# EAGLE board CT_schematic (EAGLE 7.6.0)

Size 100 x 80 mm. Coordinates in mm from the lower left corner, seen from the top.
Outline: 0,0 100,0 100,80 0,80 0,0
Copper layers (1*16): Top 0.035mm / dielectric 1.5mm / Bottom 0.035mm
Design rules "default": minimum track width 10mil, minimum drill 24mil, track to track 8mil, track to pad 8mil, pad to pad 8mil, via to via 8mil, smd to smd 8mil, copper to edge 40mil, drill to drill 8mil, minimum pad ring 10mil, minimum via ring 8mil, stop-mask expansion 4mil, vias tented up to drill 0mil, thermal gap 10mil

## Footprints (pad centres in the part's own frame; a part is rotated, then mirrored left to right if it is on the bottom)
C0603 = smd 0.8 x 0.8: 1 -0.762,0; 2 0.762,0
C0402 = smd 0.5 x 0.5: 1 -0.508,0; 2 0.508,0
R0603 = smd 0.8 x 0.8: 1 -0.762,0; 2 0.762,0
C0805 = smd 1.2 x 1.3: 1 -1.016,0; 2 1.016,0
EXV-9H = smd 3.505 x 1.676: 1 -2.857,0; 2 2.857,0
L0603 = smd 0.8 x 0.8: 1 -0.762,0; 2 0.762,0
L1210 = smd 1.2 x 2.5: 1 -1.524,0; 2 1.524,0
PJ-037B_PACKAGE = drill 3.7 square: 1 12,0 | drill 3.2 square: 2 6,0
WLCSP36 = smd 0.229 x 0.229: A1 -1,1; A2 -0.6,1; A3 -0.2,1; A4 0.2,1; A5 0.6,1; A6 1,1; B1 -1,0.6; B2 -0.6,0.6; B3 -0.2,0.6; B4 0.2,0.6; B5 0.6,0.6; B6 1,0.6; C1 -1,0.2; C2 -0.6,0.2; C3 -0.2,0.2; C4 0.2,0.2; C5 0.6,0.2; C6 1,0.2; D1 -1,-0.2; D2 -0.6,-0.2; D3 -0.2,-0.2; D4 0.2,-0.2; D5 0.6,-0.2; D6 1,-0.2; E1 -1,-0.6; E2 -0.6,-0.6; E3 -0.2,-0.6; E4 0.2,-0.6; E5 0.6,-0.6; E6 1,-0.6; F1 -1,-1; F2 -0.6,-1; F3 -0.2,-1; F4 0.2,-1; F5 0.6,-1; F6 1,-1
SSOP-16 = smd 1.981 x 0.356: 1 -2.464,2.223; 2 -2.464,1.587; 3 -2.464,0.953; 4 -2.464,0.318; 5 -2.464,-0.318; 6 -2.464,-0.953; 7 -2.464,-1.587; 8 -2.464,-2.223; 9 2.464,-2.223; 10 2.464,-1.587; 11 2.464,-0.953; 12 2.464,-0.318; 13 2.464,0.318; 14 2.464,0.953; 15 2.464,1.587; 16 2.464,2.223
HTSS-105-01-G-D = drill 1 pad 1.8 square: 1 0,0 | drill 1 pad 1.8: 2 0,2.54; 3 2.54,0; 4 2.54,2.54; 5 5.08,0; 6 5.08,2.54; 7 7.62,0; 8 7.62,2.54; 9 10.16,0; 10 10.16,2.54
USB-A-H = drill 0.914: 1 2.718,3.493; 2 2.718,1.003; 3 2.718,-1.003; 4 2.718,-3.493 | drill 2.311: 5 0,-6.566; 6 0,6.566
SOT143B = smd 1 x 0.7: 1 -0.75,-1 | smd 0.6 x 0.7: 2 0.95,-1; 3 0.95,1; 4 -0.95,1
ABS07-32.768KHZ-7-T = smd 1.1 x 2.4: 1 -2.5,0; 2 0,0
WSON-8 = smd 0.3 x 0.6: 1 -0.75,0; 2 0.05,0; 3 0.85,0; 4 1.65,0; 5 1.65,3.8; 6 0.85,3.8; 7 0.05,3.8; 8 -0.75,3.8 | smd 3 x 2.6: PAD 0.45,1.9
SON-6 = smd 0.55 x 0.3: 1 -0.355,0.5 | smd 0.52 x 0.3: 2 -0.37,0; 3 -0.37,-0.5; 4 0.37,-0.5; 5 0.37,0; 6 0.37,0.5
SW_4-1437565-2 = smd 1.4 x 2.1: 1 -2.23,4.55; 2 -2.23,-4.55; 3 2.23,4.55; 4 2.23,-4.55
LGM67K-G1J2-24-Z = smd 0.8 x 1.4: A -2,0; C 0,0
NC7SZ125M5X = smd 1.3 x 0.7: 1 -1.3,0.95; 2 -1.3,0; 3 -1.3,-0.95; 4 1.3,-0.95; 5 1.3,0.95

## Placement (x,y rotation side)
C1  1e-07  [C0603]  -46.99,57.15 0 top  (outside the outline)
C2  1e-07  [C0603]  -50.8,57.15 0 top  (outside the outline)
C3  1e-07  [C0603]  -54.61,57.15 0 top  (outside the outline)
C4  1e-07  [C0603]  -58.42,57.15 0 top  (outside the outline)
C5  4.7e-06  [C0603]  -39.37,57.15 0 top  (outside the outline)
C6  1e-08  [C0603]  -15.24,62.23 0 top  (outside the outline)
C7  1e-06  [C0603]  -19.05,62.23 0 top  (outside the outline)
C8  1e-11  [C0402]  -57.15,62.23 0 top  (outside the outline)
C9  1e-11  [C0402]  -60.96,62.23 0 top  (outside the outline)
C10  1e-06  [C0603]  -22.86,62.23 0 top  (outside the outline)
C11  1e-06  [C0603]  -26.67,62.23 0 top  (outside the outline)
C12  2.2e-07  [C0603]  -43.18,57.15 0 top  (outside the outline)
C13  1e-06  [C0603]  -30.48,62.23 0 top  (outside the outline)
C14  1e-06  [C0603]  -34.29,62.23 0 top  (outside the outline)
C15  8e-07  [R0603]  -38.1,62.23 0 top  (outside the outline)
C16  1e-05  [C0805]  -27.94,50.8 0 top  (outside the outline)
C17  1e-07  [C0402]  -15.24,67.31 0 top  (outside the outline)
C18  0.0001  [EXV-9H]  -54.61,34.29 0 top  (outside the outline)
C19  0.0001  [EXV-9H]  -17.78,44.45 0 top  (outside the outline)
C20  1e-08  [C0402]  -19.05,67.31 0 top  (outside the outline)
F1  240.0  [L0603]  -41.91,62.23 0 top  (outside the outline)
I1  1e-05  [L1210]  -59.69,43.18 0 top  (outside the outline)
J1  PJ-037B  [PJ-037B_PACKAGE]  -44.45,7.62 0 top  (outside the outline)
R1  10000.0  [R0603]  -58.42,50.8 0 top  (outside the outline)
R2  1000.0  [R0603]  -45.72,62.23 0 top  (outside the outline)
R3  910.0  [R0603]  -49.53,62.23 0 top  (outside the outline)
R4  4700.0  [R0603]  -53.34,62.23 0 top  (outside the outline)
R5  10000.0  [R0603]  -15.24,57.15 0 top  (outside the outline)
R6  100000.0  [R0603]  -33.02,50.8 0 top  (outside the outline)
R7  100000.0  [R0603]  -38.1,50.8 0 top  (outside the outline)
R8  36000.0  [R0603]  -20.32,57.15 0 top  (outside the outline)
R9  100000.0  [R0603]  -43.18,50.8 0 top  (outside the outline)
R10  10000.0  [R0603]  -25.4,57.15 0 top  (outside the outline)
R11  10000.0  [R0603]  -30.48,57.15 0 top  (outside the outline)
R12  82000.0  [R0603]  -35.56,57.15 0 top  (outside the outline)
R13  300000.0  [R0603]  -48.26,50.8 0 top  (outside the outline)
R14  120000.0  [R0603]  -53.34,50.8 0 top  (outside the outline)
U1  STM32L052T6Y6TR  [WLCSP36]  -15.24,50.8 0 top  (outside the outline)
U2  LTC2804CGN-1#PBF  [SSOP-16]  -48.26,22.86 0 top  (outside the outline)
U3  HTSS-105-01-G-D  [HTSS-105-01-G-D]  -27.94,34.29 0 top  (outside the outline)
U4  61400416021  [USB-A-H]  -19.05,8.89 0 top  (outside the outline)
U5  prtr5v0u2ax  [SOT143B]  -31.75,67.31 0 top  (outside the outline)
U6  ABS07-32.768KHZ-7-T  [ABS07-32.768KHZ-7-T]  -39.37,44.45 0 top  (outside the outline)
U7  LP2951ACSDX/NOPB  [WSON-8]  -46.99,33.02 0 top  (outside the outline)
U8  TPS3895ADRYR  [SON-6]  -35.56,66.04 0 top  (outside the outline)
U9  4-1437565-2  [SW_4-1437565-2]  -27.94,24.13 0 top  (outside the outline)
U10  Q65110A2395  [LGM67K-G1J2-24-Z]  -48.26,44.45 0 top  (outside the outline)
U11  nc7sz125m5x  [NC7SZ125M5X]  -21.59,50.8 0 top  (outside the outline)

## Library data of the parts
C1-C20 F1 I1 J1 R1-R14 U1-U11 = circuit_tree

## Nets
CLK_CRYSTAL_U1_A6: C8.1 U1.A6 U6.1
CLK_CRYSTAL_U1_B6: C9.1 U1.B6 U6.2
GND: C1.2 C2.2 C3.2 C4.2 C5.2 C6.2 C7.2 C8.2 C9.2 C10.2 C11.2 C13.2 C14.2 C15.2 C16.2 C17.2 C18.2 C19.2 C20.2 J1.2 R2.2 R5.2 R9.2 R12.2 R14.2 U1.D6 U2.8 U3.9 U4.4 U4.5 U4.6 U5.1 U7.3 U7.4 U7.PAD U8.2 U10.C U11.1 U11.3
NET_U1_C5: R5.1 U1.C5
NET_U1_C6: R4.1 U1.C6 U11.4
NET_U1_D5: C6.1 C7.1 F1.1 U1.D5 U1.E6
NET_U1_F5: R3.1 U1.F5 U10.A
NET_U1_F6: R1.1 U1.F6 U9.3 U9.4
NET_U2_6: C10.1 U2.6
NET_U2_7: C12.1 I1.2 U2.7
NET_U2_9: C11.1 U2.9
NET_U2_10: C12.2 U2.10
NET_U2_11: R6.1 U2.11
NET_U3_3: U2.1 U3.3
NET_U3_4: U2.2 U3.4
NET_U3_5: U2.3 U3.5
NET_U3_6: U2.4 U3.6
NET_U5_4: U4.1 U5.4
NET_U7_5: R7.1 U7.5
NET_U7_7: R8.2 R9.1 U7.7
NET_U8_1: R11.1 R12.1 U8.1
NET_U8_3: R13.2 R14.1 U8.3
NET_U8_4: R10.1 U8.4 U11.2
NET_U9_1: R2.1 U9.1 U9.2
PROC_LPUART1_CTS: U1.E3 U2.13
PROC_LPUART1_RTS: U1.C3 U2.15
PROC_LPUART1_RX: U1.D2 U2.16
PROC_LPUART1_TX: U1.E2 U2.14
PROC_USB_DM: U1.C2 U4.2 U5.3
PROC_USB_DP: U1.B1 U4.3 U5.2
VCC_S1_11V7: C15.1 C18.1 C19.1 J1.1 U7.8
VCC_TIER1_1V8: C1.1 C2.1 C3.1 C4.1 C5.1 C13.1 C14.1 C16.1 C17.1 C20.1 F1.2 I1.1 R1.2 R3.2 R4.2 R6.2 R7.2 R8.1 R10.2 R11.2 R13.1 U1.A5 U1.F1 U2.5 U2.12 U7.1 U8.6 U11.5

## Tracks (layer width: path | path; a pad name or v marks a point on that pad's centre or on a via)
CLK_CRYSTAL_U1_A6  (2 unrouted)
CLK_CRYSTAL_U1_B6  (2 unrouted)
GND  (38 unrouted)
NET_U1_C5  (1 unrouted)
NET_U1_C6  (2 unrouted)
NET_U1_D5  (4 unrouted)
NET_U1_F5  (2 unrouted)
NET_U1_F6  (3 unrouted)
NET_U2_6  (1 unrouted)
NET_U2_7  (2 unrouted)
NET_U2_9  (1 unrouted)
NET_U2_10  (1 unrouted)
NET_U2_11  (1 unrouted)
NET_U3_3  (1 unrouted)
NET_U3_4  (1 unrouted)
NET_U3_5  (1 unrouted)
NET_U3_6  (1 unrouted)
NET_U5_4  (1 unrouted)
NET_U7_5  (1 unrouted)
NET_U7_7  (2 unrouted)
NET_U8_1  (2 unrouted)
NET_U8_3  (2 unrouted)
NET_U8_4  (2 unrouted)
NET_U9_1  (2 unrouted)
PROC_LPUART1_CTS  (1 unrouted)
PROC_LPUART1_RTS  (1 unrouted)
PROC_LPUART1_RX  (1 unrouted)
PROC_LPUART1_TX  (1 unrouted)
PROC_USB_DM  (2 unrouted)
PROC_USB_DP  (2 unrouted)
VCC_S1_11V7  (4 unrouted)
VCC_TIER1_1V8  (27 unrouted)